# EAGLE board CLASS D AMPLIFIRE 1  (EAGLE 7.2.0)
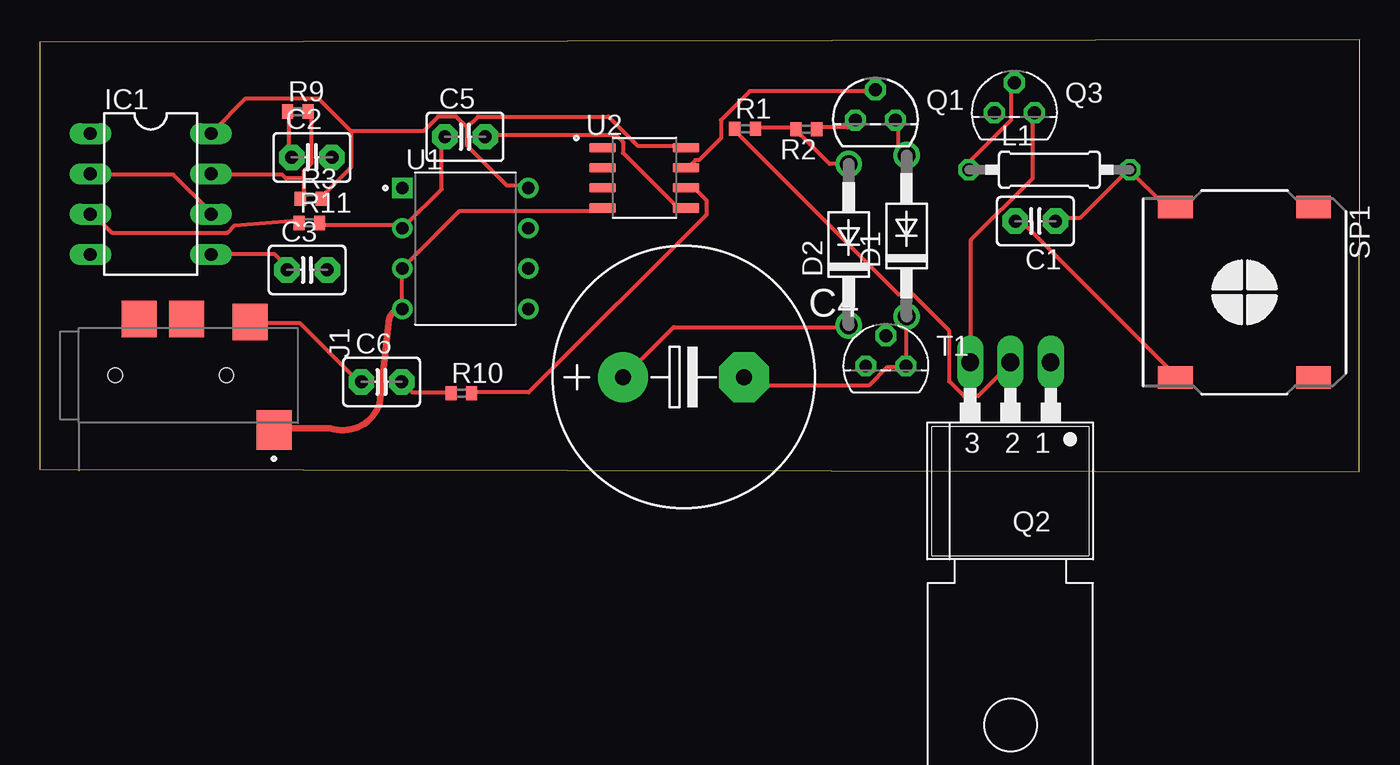
[diagram p0: board, top side]
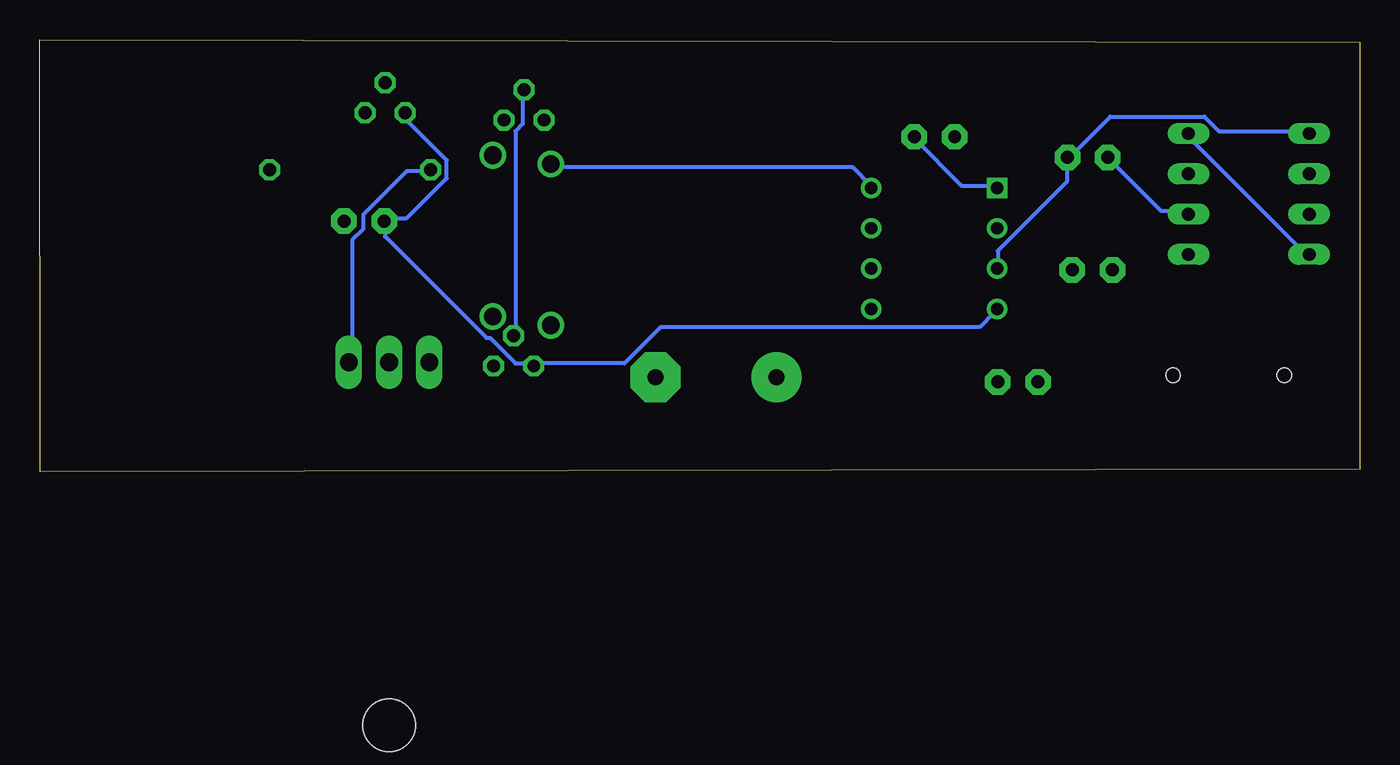
[diagram p1: board, bottom side, seen from below]

Size 83.23 x 27.21 mm. Coordinates in mm from the lower left corner, seen from the top.
Outline: 0,0.15 83.18,0 83.23,27.21 0,27.04 0,0.15
Copper layers (1*16): Top 0.035mm / dielectric 1.5mm / Bottom 0.035mm
Design rules "default": minimum track width 10mil, minimum drill 24mil, track to track 8mil, track to pad 8mil, pad to pad 8mil, via to via 8mil, smd to smd 8mil, copper to edge 40mil, drill to drill 8mil, minimum pad ring 10mil, minimum via ring 8mil, stop-mask expansion 4mil, vias tented up to drill 0mil, thermal gap 10mil

## Footprints (pad centres in the part's own frame; a part is rotated, then mirrored left to right if it is on the bottom)
C2.5-3 = drill 0.813 pad 1.6 octagon: 1 -1.27,0; 2 1.27,0
E7,5-16 = drill 1.016 pad 3.15: + -3.81,0 | drill 1.016 pad 3.15 octagon: - 3.81,0
DO41-10 = drill 1.118: A 5.08,0; C -5.08,0
DIL-08 = drill 0.813 long: 1 -3.81,-3.81; 2 -1.27,-3.81; 3 1.27,-3.81; 4 3.81,-3.81; 5 3.81,3.81; 6 1.27,3.81; 7 -1.27,3.81; 8 -3.81,3.81
SAMESKY_SJ2-3574A-SMT-TR = smd 2.5 x 2.2: 1 3.45,6.5 | smd 2.3 x 2.2: 2 -3.35,5; 3 -3.55,1; 4 -3.55,-2 | hole 0.9: 0,-3.5; 0,3.5
0207/10 = drill 0.813 octagon: 1 -5.08,0; 2 5.08,0
TO92 = drill 0.813 octagon: 1 1.27,0; 2 0,1.905; 3 -1.27,0
TO202 = drill 1.118 long: 1 -2.54,-5.08; 2 0,-5.08; 3 2.54,-5.08 | hole 3.302: 0,17.78
R1005 = smd 0.7 x 0.9: 1 -0.65,0; 2 0.65,0
SMS-1308MS-2-R = smd 1.4 x 2.2: + -5.375,-4.35; - 5.375,-4.35; M1 -5.375,4.35; M2 5.375,4.35
DIP794W45P254L959H508Q8 = drill 0.78 pad 1.13 square: 1 -3.97,3.81 | drill 0.78 pad 1.13: 2 -3.97,1.27; 3 -3.97,-1.27; 4 -3.97,-3.81; 5 3.97,-3.81; 6 3.97,-1.27; 7 3.97,1.27; 8 3.97,3.81
SOIC127P600X175-8N = smd 1.67 x 0.6: 1 -2.625,1.905; 2 -2.625,0.635; 3 -2.625,-0.635; 4 -2.625,-1.905; 5 2.625,-1.905; 6 2.625,-0.635; 7 2.625,0.635; 8 2.625,1.905

## Placement (x,y rotation side)
C1  [C2.5-3]  62.77,15.78 180 top
C2  [C2.5-3]  17.16,19.8 0 top
C3  [C2.5-3]  16.86,12.71 0 top
C4  [E7,5-16]  40.59,5.95 0 top
C5  [C2.5-3]  26.81,21.09 0 top
C6  [C2.5-3]  21.55,5.65 0 top
D1  1N4933  [DO41-10]  54.65,14.85 90 top
D2  1N4933  [DO41-10]  51,14.3 90 top
IC1  NE555  [DIL-08]  7,17.49 270 top
J1  SJ2-3574A-SMT-TR  [SAMESKY_SJ2-3574A-SMT-TR]  8.27,6.06 270 top
L1  [0207/10]  63.66,19.02 0 top
Q1  2N3906  [TO92]  52.69,22.15 0 top
Q2  BSS97  [TO202]  61.2,1.8 180 top
Q3  BSS92  [TO92]  61.45,22.6 0 top
R1  [R1005]  44.47,21.6 0 top
R2  [R1005]  48.34,21.57 180 top
R3  [R1005]  17.08,17.19 0 top
R9  [R1005]  16.29,22.68 0 top
R10  [R1005]  26.58,4.94 0 top
R11  [R1005]  17.01,15.67 0 top
SP1  SMS-1308MS-2-R  [SMS-1308MS-2-R]  75.96,11.29 270 top
T1  2N3904  [TO92]  53.34,6.65 0 top
U1  OPA2134PAG4  [DIP794W45P254L959H508Q8]  26.83,14.06 0 top
U2  LM393D  [SOIC127P600X175-8N]  38.12,18.51 0 top

## Library data of the parts
C1 = capacitor-wima; C1: 2.2uf
C2 = capacitor-wima; C5: 1nf
C3 = capacitor-wima; C5: 10nf
C4 = rcl; C10: 10uf
C5 = capacitor-wima; C5: 1.2nf
C6 = capacitor-wima; C5: 1uf
D1 D2 = diode
IC1 = st-microelectronics; MF: Arrow Electronics; MPN: NE555N; OC_FARNELL: 1467742; OC_NEWARK: 89K1486
J1 = SJ2-3574A-SMT-TR (3); AVAILABILITY: In Stock; CHECK_PRICES: https://www.snapeda.com/parts/SJ2-3574A-SMT-TR/Same+Sky/view-part/?ref=eda; DESCRIPTION: 4 conductors, 3.5mm, SMT Audio Jack; MF: Same Sky; MP: SJ2-3574A-SMT-TR; PACKAGE: None; PRICE: None; SNAPEDA_LINK: https://www.snapeda.com/parts/SJ2-3574A-SMT-TR/Same+Sky/view-part/?ref=snap
L1 = eagle-ltspice; SPICEMODEL: NONE; SPICEPREFIX: 47uh
Q1 = transistor-pnp
Q2 Q3 = transistor-fet
R1 R2 = eagle-ltspice; SPICEMODEL: 10kohm; SPICEPREFIX: R
R3 = eagle-ltspice; SPICEMODEL: NONE; SPICEPREFIX: 2.2kohm
R9 = eagle-ltspice; SPICEMODEL: NONE; SPICEPREFIX: 6kohm
R10 = eagle-ltspice; SPICEMODEL: NONE; SPICEPREFIX: 1kohm
R11 = eagle-ltspice; SPICEMODEL: NONE; SPICEPREFIX: 10kohm
SP1 = speaker
T1 = transistor
U1 = OPA2134PAG4 (1); CHECK_PRICES: https://www.snapeda.com/parts/OPA2134PAG4/Texas+Instruments/view-part/?ref=eda; DESCRIPTION: SoundPlus™ Audio Operational Amplifier with Low Distortion, Low Noise and Precision 8-PDIP -40 to 85; DIGIKEY_PART_NUMBER: 296-36122-5-ND; MF: Texas Instruments; MP: OPA2134PAG4; PACKAGE: PDIP-8 Texas; SNAPEDA_LINK: https://www.snapeda.com/parts/OPA2134PAG4/Texas+Instruments/view-part/?ref=snap
U2 = LM393D; CHECK_PRICES: https://www.snapeda.com/parts/LM393D/STMicroelectronics/view-part/?ref=eda; DESCRIPTION: Comparator General Purpose CMOS, DTL, ECL, MOS, Open-Collector, TTL 8-SOIC; DIGIKEY_PART_NUMBER: 497-18379-ND; MF: STMicroelectronics; MP: LM393D; PACKAGE: SOIC-8 STMicroelectronics; SNAPEDA_LINK: https://www.snapeda.com/parts/LM393D/STMicroelectronics/view-part/?ref=snap

## Nets
GND: C1.2 C2.2 IC1.1 J1.1 Q3.3 SP1.- T1.3 U1.3 U1.4 U2.4
N$1: Q2.3 Q3.1
N$2: C4.- D1.C T1.1
N$3: D1.A Q1.1
N$4: Q1.3 R2.1
N$6: C5.2 U1.1 U2.5
N$7: C4.+ D2.C
N$8: Q1.2 T1.2 U2.7
N$9: L1.1 Q2.1 Q3.2
N$10: C1.1 L1.2 SP1.+
N$11: C3.1 IC1.5
N$15: Q2.2 R1.1
N$16: C3.2
N$17: IC1.7 R3.1 R9.2
N$18: IC1.3 R11.1
N$19: C2.1 IC1.2 IC1.6 R9.1
N$20: C5.1 R11.2 U1.2
N$21: C6.1 J1.2
N$22: C6.2 R10.1
N$23: R10.2 U2.6
VCC: D2.A IC1.4 IC1.8 R1.2 R2.2 R3.2 U1.8 U2.8

## Tracks (layer width: path | path; a pad name or v marks a point on that pad's centre or on a via)
GND
  Top 0.254: SP1.- 71.52,6.14 61.69,15.97 C1.2 | U2.4 35.4,16.42 26.48,16.42 23.05,12.99 U1.3 22.82,12.77 22.82,10.25 U1.4
  Top 0.406: J1.1 14.8,2.61 14.8,2.73 18.3,2.73 arc90 21.42,4.28 22,9.38 arc-90 U1.4
  Bottom 0.254: Q3.3 60.09,22.59 60.09,22.14 57.57,19.62 57.57,18.48 60.09,15.97 61.46,15.97 C1.2 61.46,15.74 61.46,14.82 55.06,8.42 54.83,8.42 53.23,6.82 52.09,6.82 T1.3 51.86,6.82 46.37,6.82 44.08,9.11 23.97,9.11 23.05,10.02 U1.4 | IC1.1 3.39,21.45 8.88,21.45 9.79,22.37 15.74,22.37 18.25,19.85 C2.2 18.48,19.62 18.48,18.25 22.82,13.91 22.82,12.99 U1.3
N$1
  Top 0.254: Q3.1 62.6,22.59 62.6,18.48 58.71,14.59 58.71,7.05 Q2.3
N$2
  Top 0.254: D1.C 54.6,9.57 54.6,6.82 T1.1 54.6,6.59 53.46,6.59 52.31,5.45 45,5.45 44.54,5.91 C4.-
N$3
  Top 0.254: Q1.1 54.14,22.14 54.14,20.54 54.6,20.08 D1.A
N$4
  Top 0.254: R2.1 49.11,21.68 50.94,21.68 51.4,22.14 Q1.3
N$6
  Top 0.254: U2.5 40.66,16.65 40.2,16.65 36.77,20.08 36.77,20.77 36.31,21.22 28.31,21.22 C5.2
  Bottom 0.254: U1.1 23.05,18.02 25.11,18.02 28.08,21 C5.2
N$7
  Top 0.254: D2.C 50.94,9.11 39.97,9.11 37,6.14 C4.+
N$8
  Top 0.254: U2.7 40.88,19.17 41.34,19.62 41.57,19.62 42.94,21 42.94,22.14 44.77,23.97 52.54,23.97 Q1.2
  Bottom 0.254: T1.2 53.23,8.65 53.23,21.45 52.77,21.91 52.77,23.97 Q1.2
N$9
  Top 0.254: L1.1 58.71,19.17 58.71,19.62 61.23,22.14 61.23,24.42 Q3.2
  Bottom 0.254: Q2.1 63.52,7.05 63.52,14.59 62.83,15.28 62.83,16.2 60.09,18.94 58.71,18.94 L1.1
N$10
  Top 0.254: SP1.+ 71.52,16.88 70.83,16.88 68.77,18.94 L1.2 68.54,18.94 65.57,15.97 64.2,15.97 C1.1
N$11
  Top 0.254: IC1.5 14.82,13.68 15.51,12.99 C3.1
N$15
  Top 0.254: R1.1 43.85,21.45 54.14,11.16 55.06,11.16 57.34,8.88 57.34,5.68 58.26,4.77 59.17,4.77 61.23,6.82 Q2.2
N$17
  Top 0.254: 16.65,18.48 16.65,18.94 17.11,19.39 17.11,22.59 R9.2 | 16.65,18.48 16.65,17.34 R3.1 | 16.65,18.48 15.51,18.48 15.28,18.71 10.94,18.71 IC1.7
N$18
  Top 0.254: R11.1 16.22,15.83 12.31,15.51 11.85,15.05 4.54,15.05 3.39,16.2 IC1.3
N$19
  Top 0.254: R9.1 15.74,22.59 15.74,19.85 C2.1 | IC1.2 3.39,18.71 8.42,18.71 10.71,16.42 IC1.6
  Bottom 0.254: IC1.6 10.94,16.42 12.54,16.42 15.74,19.62 C2.1
N$20
  Top 0.254: R11.2 17.79,15.51 22.82,15.51 U1.2 23.05,15.51 25.34,17.8 25.34,21 C5.1
N$21
  Top 0.254: J1.2 13.45,9.34 16.42,9.34 20.08,5.68 C6.1
N$22
  Top 0.254: R10.1 25.8,4.99 23.51,4.99 23.05,5.45 C6.2
N$23
  Top 0.254: R10.2 27.4,4.99 30.82,4.99 42.03,16.2 42.03,17.11 41.34,17.8 40.88,17.8 U2.6
VCC
  Top 0.254: 19.62,21.45 19.62,19.17 17.79,17.34 R3.2 | 19.62,21.45 17.57,23.51 12.99,23.51 10.94,21.45 IC1.8 | R1.2 45.23,21.68 47.51,21.68 R2.2 47.74,21.45 49.8,19.39 50.94,19.39 D2.A | 26.94,21.68 27.62,22.37 35.85,22.37 37.68,20.54 40.66,20.54 U2.8 | 26.94,21.68 26.94,20.54 29.45,18.02 30.6,18.02 U1.8 | 19.62,21.45 24.2,21.45 25.11,22.37 26.25,22.37 26.94,21.68
  Bottom 0.254: IC1.4 3.39,13.68 10.94,21.22 IC1.8 | D2.A 50.94,19.17 31.97,19.17 30.82,18.02 U1.8